# EAGLE board CT_schematic (EAGLE 7.6.0)

Size 100 x 80 mm. Coordinates in mm from the lower left corner, seen from the top.
Outline: 0,0 100,0 100,80 0,80 0,0
Copper layers (1*16): Top 0.035mm / dielectric 1.5mm / Bottom 0.035mm
Design rules "default": minimum track width 10mil, minimum drill 24mil, track to track 8mil, track to pad 8mil, pad to pad 8mil, via to via 8mil, smd to smd 8mil, copper to edge 40mil, drill to drill 8mil, minimum pad ring 10mil, minimum via ring 8mil, stop-mask expansion 4mil, vias tented up to drill 0mil, thermal gap 10mil

## Footprints (pad centres in the part's own frame; a part is rotated, then mirrored left to right if it is on the bottom)
C0603 = smd 0.8 x 0.8: 1 -0.762,0; 2 0.762,0
C0402 = smd 0.5 x 0.5: 1 -0.508,0; 2 0.508,0
C0805 = smd 1.2 x 1.3: 1 -1.016,0; 2 1.016,0
C1210 = smd 1.2 x 2.5: 1 -1.524,0; 2 1.524,0
EXV-9H = smd 3.505 x 1.676: 1 -2.857,0; 2 2.857,0
L0603 = smd 0.8 x 0.8: 1 -0.762,0; 2 0.762,0
PJ-037B_PACKAGE = drill 3.7 square: 1 12,0 | drill 3.2 square: 2 6,0
R0603 = smd 0.8 x 0.8: 1 -0.762,0; 2 0.762,0
LQFP64 = smd 0.3 x 1.2: 1 -3.75,-5.75; 2 -3.25,-5.75; 3 -2.75,-5.75; 4 -2.25,-5.75; 5 -1.75,-5.75; 6 -1.25,-5.75; 7 -0.75,-5.75; 8 -0.25,-5.75; 9 0.25,-5.75; 10 0.75,-5.75; 11 1.25,-5.75; 12 1.75,-5.75; 13 2.25,-5.75; 14 2.75,-5.75; 15 3.25,-5.75; 16 3.75,-5.75; 33 3.75,5.75; 34 3.25,5.75; 35 2.75,5.75; 36 2.25,5.75; 37 1.75,5.75; 38 1.25,5.75; 39 0.75,5.75; 40 0.25,5.75; 41 -0.25,5.75; 42 -0.75,5.75; 43 -1.25,5.75; 44 -1.75,5.75; 45 -2.25,5.75; 46 -2.75,5.75; 47 -3.25,5.75; 48 -3.75,5.75 | smd 1.2 x 0.3: 17 5.75,-3.75; 18 5.75,-3.25; 19 5.75,-2.75; 20 5.75,-2.25; 21 5.75,-1.75; 22 5.75,-1.25; 23 5.75,-0.75; 24 5.75,-0.25; 25 5.75,0.25; 26 5.75,0.75; 27 5.75,1.25; 28 5.75,1.75; 29 5.75,2.25; 30 5.75,2.75; 31 5.75,3.25; 32 5.75,3.75; 49 -5.75,3.75; 50 -5.75,3.25; 51 -5.75,2.75; 52 -5.75,2.25; 53 -5.75,1.75; 54 -5.75,1.25; 55 -5.75,0.75; 56 -5.75,0.25; 57 -5.75,-0.25; 58 -5.75,-0.75; 59 -5.75,-1.25; 60 -5.75,-1.75; 61 -5.75,-2.25; 62 -5.75,-2.75; 63 -5.75,-3.25; 64 -5.75,-3.75
TST-110-05-T-D-RA = drill 1 pad 1.7 square: 1 0,0 | drill 1 pad 1.7: 2 0,2.54; 3 2.54,0; 4 2.54,2.54; 5 5.08,0; 6 5.08,2.54; 7 7.62,0; 8 7.62,2.54; 9 10.16,0; 10 10.16,2.54; 11 12.7,0; 12 12.7,2.54; 13 15.24,0; 14 15.24,2.54; 15 17.78,0; 16 17.78,2.54; 17 20.32,0; 18 20.32,2.54; 19 22.86,0; 20 22.86,2.54
LGA-12 = smd 0.35 x 0.3: 1 -0.8,0.75; 2 -0.8,0.25; 3 -0.8,-0.25; 4 -0.8,-0.75; 7 0.8,-0.75; 8 0.8,-0.25; 9 0.8,0.25; 10 0.8,0.75 | smd 0.3 x 0.35: 5 -0.25,-0.8; 6 0.25,-0.8; 11 0.25,0.8; 12 -0.25,0.8
SOIC-8 = smd 1.6 x 0.6: 1 -2.7,1.905 | smd 1.55 x 0.6: 2 -2.7,0.635; 3 -2.7,-0.635; 4 -2.7,-1.905; 5 2.7,-1.905; 6 2.7,-0.635; 7 2.7,0.635; 8 2.7,1.905
182-009-MALE = drill 1.194 pad 1.524 octagon: 1 -5.537,10.923; 2 -2.769,10.923; 3 0,10.923; 4 2.769,10.923; 5 5.537,10.923; 6 -4.153,8.08; 7 -1.384,8.08; 8 1.384,8.08; 9 4.153,8.08 | hole 3.048: -12.446,9.501; 12.446,9.501
ABS07-32.768KHZ-7-T = smd 1.1 x 2.4: 1 -2.5,0; 2 0,0
ABLS-25.000MHZ-B2F-T = smd 5.6 x 2.8: 1 -3.81,0; 2 5.69,0
WSON-8 = smd 0.3 x 0.6: 1 -0.75,0; 2 0.05,0; 3 0.85,0; 4 1.65,0; 5 1.65,3.8; 6 0.85,3.8; 7 0.05,3.8; 8 -0.75,3.8 | smd 3 x 2.6: PAD 0.45,1.9
SON-6 = smd 0.55 x 0.3: 1 -0.355,0.5 | smd 0.52 x 0.3: 2 -0.37,0; 3 -0.37,-0.5; 4 0.37,-0.5; 5 0.37,0; 6 0.37,0.5
SW_4-1437565-2 = smd 1.4 x 2.1: 1 -2.23,4.55; 2 -2.23,-4.55; 3 2.23,4.55; 4 2.23,-4.55
LGM67K-G1J2-24-Z = smd 0.8 x 1.4: A -2,0; C 0,0
NC7SZ125M5X = smd 1.3 x 0.7: 1 -1.3,0.95; 2 -1.3,0; 3 -1.3,-0.95; 4 1.3,-0.95; 5 1.3,0.95
DUMMY_PACKAGE_129 = drill 0.3: 1 0,-1; 2 1.5,-1; 3 3,-1

## Placement (x,y rotation side)
C1  1e-06  [C0603]  -15.24,68.58 0 top  (outside the outline)
C2  1e-07  [C0603]  -19.05,68.58 0 top  (outside the outline)
C3  1e-07  [C0603]  -22.86,68.58 0 top  (outside the outline)
C4  1e-07  [C0603]  -26.67,68.58 0 top  (outside the outline)
C5  1e-07  [C0603]  -30.48,68.58 0 top  (outside the outline)
C6  4.7e-06  [C0603]  -71.12,63.5 0 top  (outside the outline)
C7  1e-07  [C0603]  -34.29,68.58 0 top  (outside the outline)
C8  1e-07  [C0603]  -38.1,68.58 0 top  (outside the outline)
C9  1e-08  [C0603]  -41.91,68.58 0 top  (outside the outline)
C10  1e-06  [C0603]  -45.72,68.58 0 top  (outside the outline)
C11  1e-11  [C0402]  -26.67,73.66 0 top  (outside the outline)
C12  1e-11  [C0402]  -30.48,73.66 0 top  (outside the outline)
C13  1e-11  [C0402]  -34.29,73.66 0 top  (outside the outline)
C14  1e-11  [C0402]  -38.1,73.66 0 top  (outside the outline)
C15  1e-07  [C0402]  -41.91,73.66 0 top  (outside the outline)
C16  1e-05  [C0805]  -15.24,63.5 0 top  (outside the outline)
C17  1e-07  [C0402]  -45.72,73.66 0 top  (outside the outline)
C18  1e-07  [C0402]  -49.53,73.66 0 top  (outside the outline)
C19  1e-07  [C0402]  -53.34,73.66 0 top  (outside the outline)
C20  1e-08  [C0402]  -57.15,73.66 0 top  (outside the outline)
C21  1e-05  [C1210]  -48.26,57.15 0 top  (outside the outline)
C22  1e-05  [C1210]  -54.61,57.15 0 top  (outside the outline)
C23  1e-07  [C0402]  -60.96,73.66 0 top  (outside the outline)
C24  0.0001  [EXV-9H]  -17.78,49.53 0 top  (outside the outline)
C25  0.0001  [EXV-9H]  -29.21,49.53 0 top  (outside the outline)
C26  1e-08  [C0402]  -64.77,73.66 0 top  (outside the outline)
C27  1e-08  [C0402]  -68.58,73.66 0 top  (outside the outline)
F1  240.0  [L0603]  -49.53,68.58 0 top  (outside the outline)
J1  PJ-037B  [PJ-037B_PACKAGE]  -67.31,7.62 0 top  (outside the outline)
R2  1000.0  [R0603]  -53.34,68.58 0 top  (outside the outline)
R4  4700.0  [R0603]  -57.15,68.58 0 top  (outside the outline)
R5  2200.0  [R0603]  -60.96,68.58 0 top  (outside the outline)
R6  2200.0  [R0603]  -64.77,68.58 0 top  (outside the outline)
R7  10000.0  [R0603]  -46.99,63.5 0 top  (outside the outline)
R8  10000.0  [R0603]  -52.07,63.5 0 top  (outside the outline)
R9  10000.0  [R0603]  -57.15,63.5 0 top  (outside the outline)
R10  120.0  [R0603]  -68.58,68.58 0 top  (outside the outline)
R11  100000.0  [R0603]  -26.67,63.5 0 top  (outside the outline)
R12  100000.0  [R0603]  -31.75,63.5 0 top  (outside the outline)
R13  2231.0  [R0603]  -15.24,73.66 0 top  (outside the outline)
R14  1000.0  [R0603]  -19.05,73.66 0 top  (outside the outline)
R15  10000.0  [R0603]  -62.23,63.5 0 top  (outside the outline)
R16  10000.0  [R0603]  -67.31,63.5 0 top  (outside the outline)
R17  9100.0  [R0603]  -22.86,73.66 0 top  (outside the outline)
R18  680000.0  [R0603]  -36.83,63.5 0 top  (outside the outline)
R19  120000.0  [R0603]  -41.91,63.5 0 top  (outside the outline)
U1  stm32f091rct6  [LQFP64]  -22.86,29.21 0 top  (outside the outline)
U2  TST-110-05-T-D-RA  [TST-110-05-T-D-RA]  -67.31,38.1 0 top  (outside the outline)
U3  LIS2HH12TR  [LGA-12]  -21.59,63.5 0 top  (outside the outline)
U4  SN65HVD230D  [SOIC-8]  -58.42,27.94 0 top  (outside the outline)
U5  182-009-113R531  [182-009-MALE]  -36.83,6.35 0 top  (outside the outline)
U6  ABS07-32.768KHZ-7-T  [ABS07-32.768KHZ-7-T]  -27.94,57.15 0 top  (outside the outline)
U7  ABLS-25.000MHZ-B2F-T  [ABLS-25.000MHZ-B2F-T]  -48.26,49.53 0 top  (outside the outline)
U8  LP3878SDX-ADJ/NOPB  [WSON-8]  -30.48,39.37 0 top  (outside the outline)
U9  TPS3895ADRYR  [SON-6]  -20.32,77.47 0 top  (outside the outline)
U10  4-1437565-2  [SW_4-1437565-2]  -44.45,27.94 0 top  (outside the outline)
U11  Q65110A2395  [LGM67K-G1J2-24-Z]  -36.83,57.15 0 top  (outside the outline)
U12  nc7sz125m5x  [NC7SZ125M5X]  -59.69,55.88 0 top  (outside the outline)
U13  nc7sz125m5x  [NC7SZ125M5X]  -66.04,55.88 0 top  (outside the outline)
U14  Dummy  [DUMMY_PACKAGE_129]  -17.78,78.74 0 top  (outside the outline)

## Library data of the parts
C1-C27 F1 J1 R2 R4-R19 U1-U14 = circuit_tree

## Nets
CLK_CRYSTAL_U1_3: C11.1 U1.3 U6.1
CLK_CRYSTAL_U1_4: C12.1 U1.4 U6.2
CLK_CRYSTAL_U1_5: C13.1 U1.5 U7.1
CLK_CRYSTAL_U1_6: C14.1 U1.6 U7.2
GND: C1.2 C2.2 C3.2 C4.2 C5.2 C6.2 C7.2 C8.2 C9.2 C10.2 C11.2 C12.2 C13.2 C14.2 C15.2 C16.2 C17.2 C18.2 C19.2 C20.2 C21.2 C22.2 C23.2 C24.2 C25.2 C26.2 C27.2 J1.2 R2.2 R7.2 R11.2 R14.2 R17.2 R19.2 U1.12 U1.18 U1.31 U1.47 U1.63 U2.4 U2.6 U2.8 U2.10 U2.12 U2.14 U2.16 U2.18 U2.20 U3.5 U3.6 U3.7 U3.8 U4.2 U5.5 U8.3 U8.PAD U9.2 U11.C U12.2 U12.3 U13.1 U13.3 U14.1
NET_U1_7: R4.1 U1.7 U13.4
NET_U1_13: C9.1 C10.1 F1.1 U1.13
NET_U1_42: R5.1 U1.42 U3.1
NET_U1_43: R6.1 U1.43 U3.4
NET_U1_60: R7.1 U1.60
NET_U1_61: U11.A
NET_U1_62: U10.3 U10.4
NET_U3_2: R9.1 U3.2
NET_U4_6: R10.2 U4.6
NET_U4_8: R11.1 U4.8
NET_U5_2: R10.2 U4.6 U5.2
NET_U5_3: R10.1 U4.7 U5.3
NET_U8_1: C20.1 U8.1
NET_U8_6: R13.2 R14.1 U8.6
NET_U8_8: R12.1 U8.8
NET_U9_1: R16.1 R17.1 U9.1
NET_U9_3: R18.2 R19.1 U9.3
NET_U9_4: R15.1 U9.4 U12.4 U13.2
NET_U10_1: R2.1 U10.1 U10.2
PROC_CAN_RX: U1.44 U4.4
PROC_CAN_TX: U1.45 U4.1
PROC_PC0: U1.8 U14.3
PROC_PC13: U1.2 U14.2
PROC_SYS_SWCLK: U1.49 U2.9
PROC_SYS_SWDIO: U1.46 U2.7
RST_OUT_U2_SRESET_B: R8.1 U2.15 U12.1
VCC_S1_13V4: C21.1 C24.1 C25.1 J1.1 R12.2 U8.4
VCC_TIER1_3V3: C1.1 C2.1 C3.1 C4.1 C5.1 C6.1 C7.1 C8.1 C15.1 C16.1 C17.1 C18.1 C19.1 C22.1 C23.1 C26.1 C27.1 F1.2 R4.2 R5.2 R6.2 R8.2 R9.2 R13.1 R15.2 R16.2 R18.1 U1.1 U1.19 U1.32 U1.48 U1.64 U2.1 U3.9 U3.10 U4.3 U8.5 U9.6 U12.5 U13.5

## Tracks (layer width: path | path; a pad name or v marks a point on that pad's centre or on a via)
CLK_CRYSTAL_U1_3  (2 unrouted)
CLK_CRYSTAL_U1_4  (2 unrouted)
CLK_CRYSTAL_U1_5  (2 unrouted)
CLK_CRYSTAL_U1_6  (2 unrouted)
GND  (62 unrouted)
NET_U1_7  (2 unrouted)
NET_U1_13  (3 unrouted)
NET_U1_42  (2 unrouted)
NET_U1_43  (2 unrouted)
NET_U1_60  (1 unrouted)
NET_U1_62  (1 unrouted)
NET_U3_2  (1 unrouted)
NET_U4_6  (1 unrouted)
NET_U4_8  (1 unrouted)
NET_U5_2  (2 unrouted)
NET_U5_3  (2 unrouted)
NET_U8_1  (1 unrouted)
NET_U8_6  (2 unrouted)
NET_U8_8  (1 unrouted)
NET_U9_1  (2 unrouted)
NET_U9_3  (2 unrouted)
NET_U9_4  (3 unrouted)
NET_U10_1  (2 unrouted)
PROC_CAN_RX  (1 unrouted)
PROC_CAN_TX  (1 unrouted)
PROC_PC0  (1 unrouted)
PROC_PC13  (1 unrouted)
PROC_SYS_SWCLK  (1 unrouted)
PROC_SYS_SWDIO  (1 unrouted)
RST_OUT_U2_SRESET_B  (2 unrouted)
VCC_S1_13V4  (5 unrouted)
VCC_TIER1_3V3  (39 unrouted)